# EAGLE board LED_WITH_8051 (EAGLE 9.6.2)
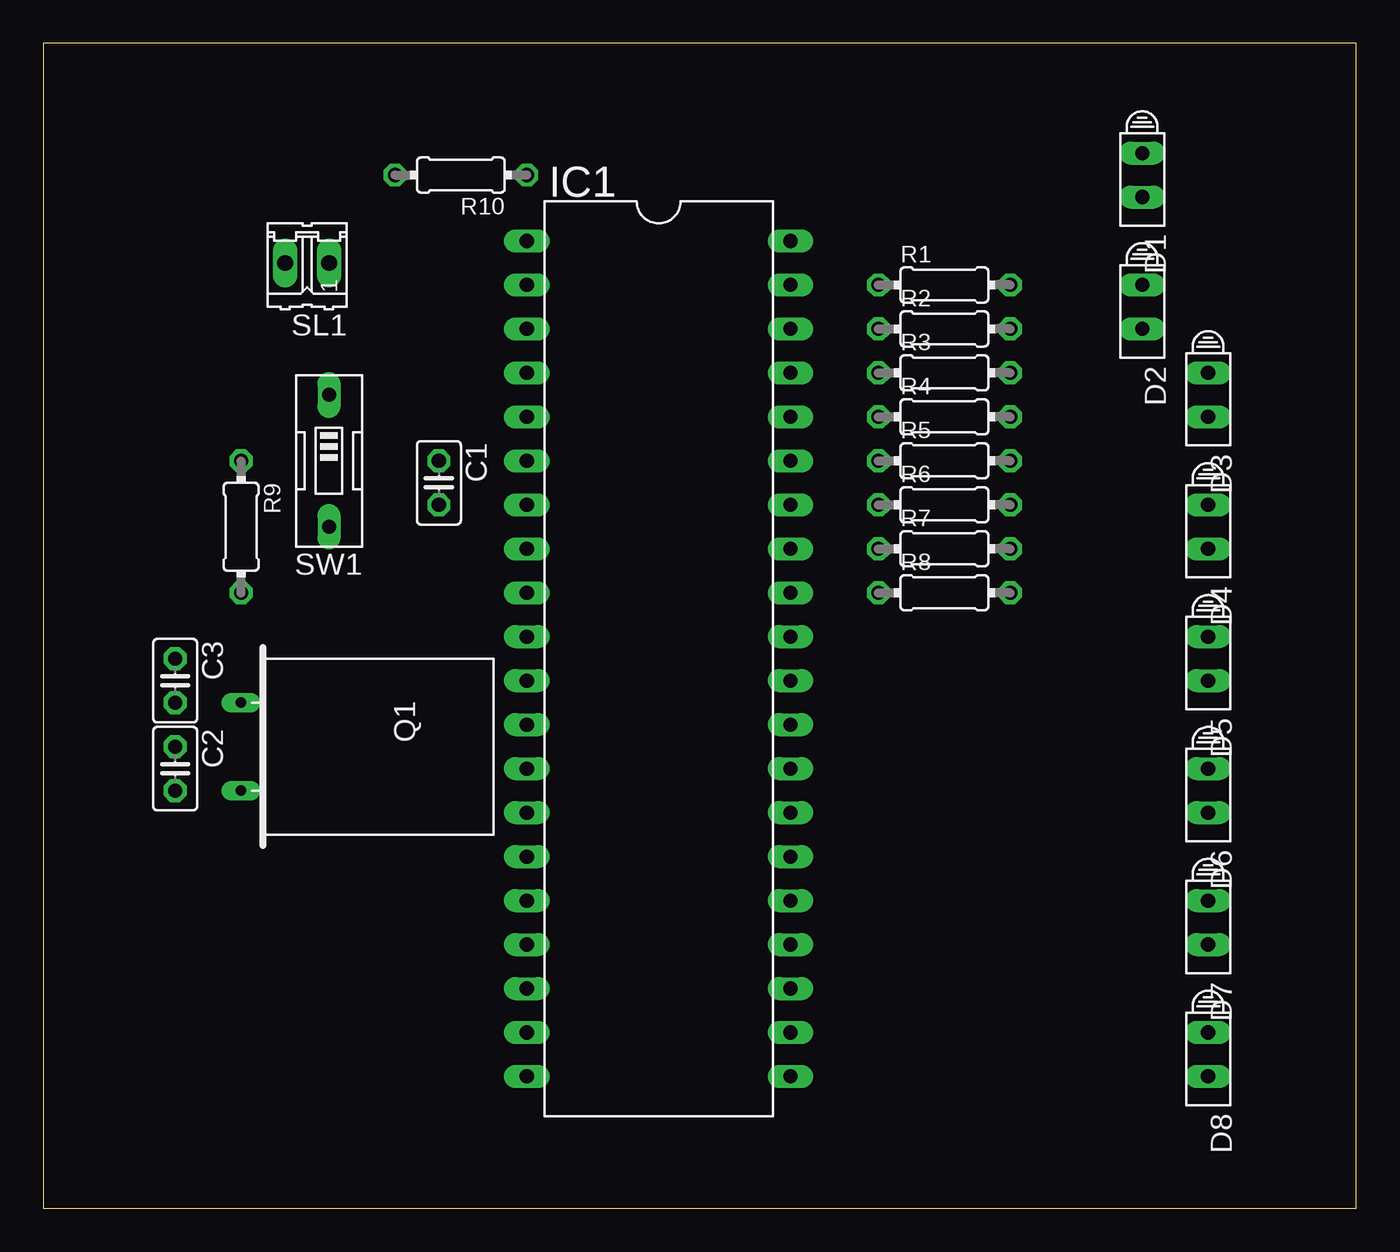
[diagram p0: board, top side]
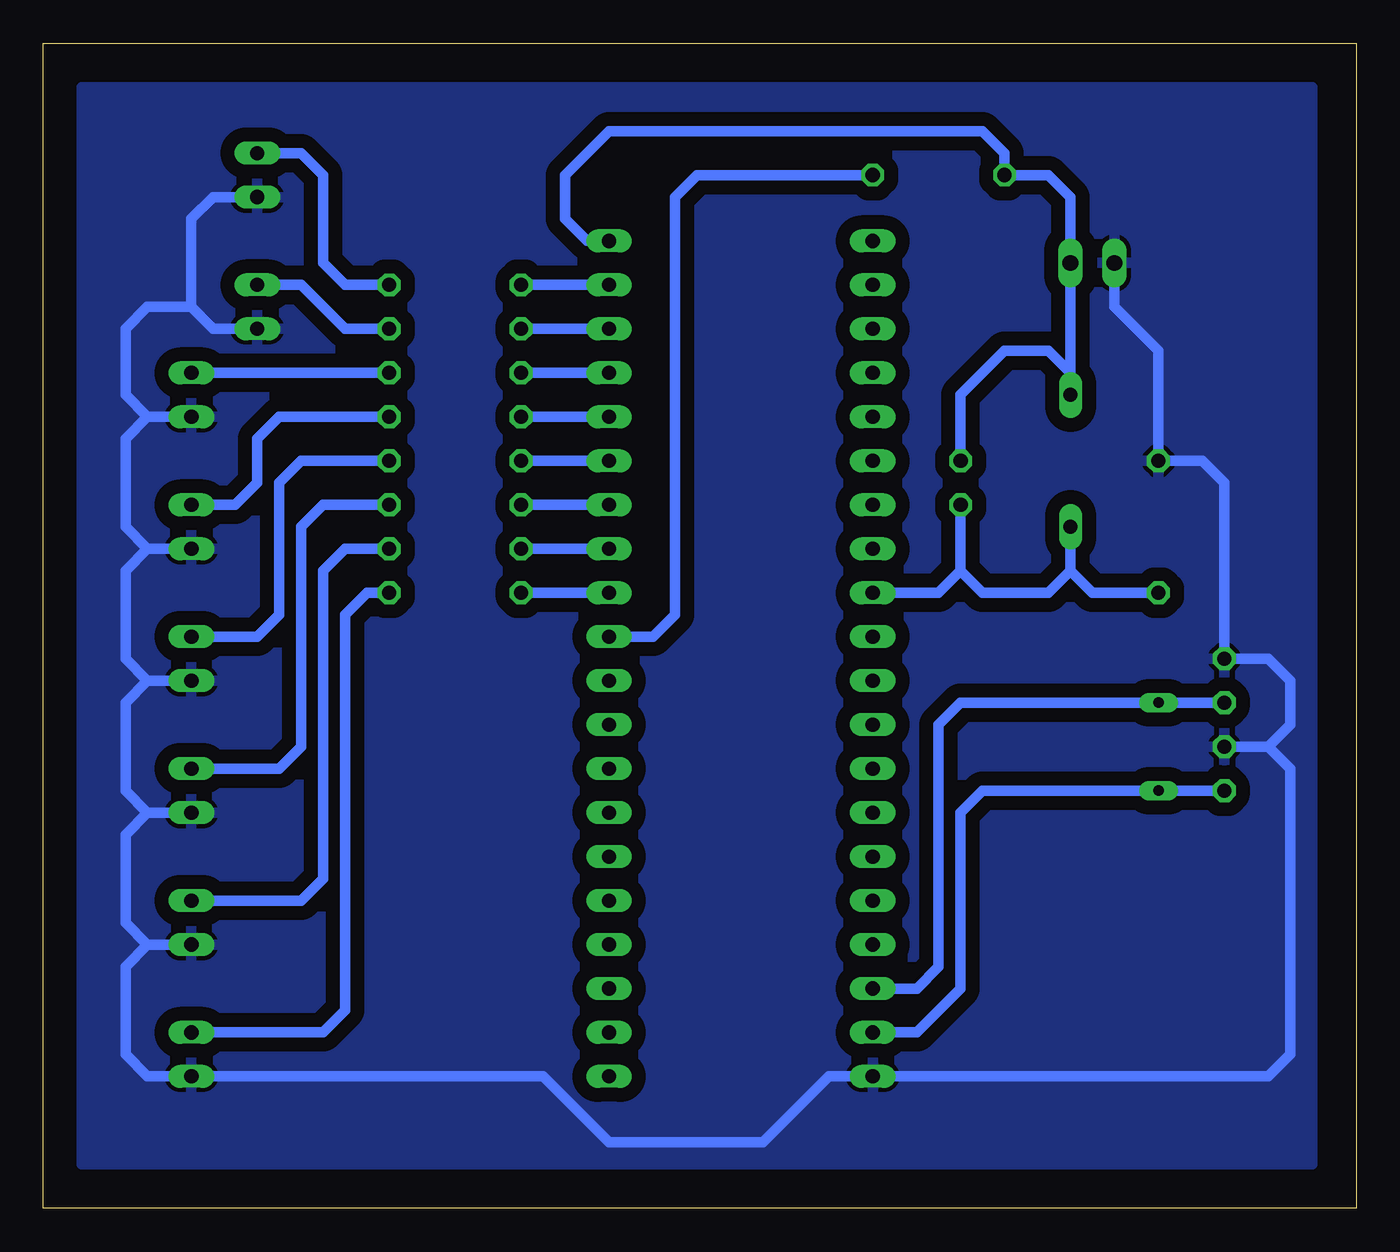
[diagram p1: board, bottom side, seen from below]

Size 75.87 x 67.3 mm. Coordinates in mm from the lower left corner, seen from the top.
Outline: 0,0 75.87,0 75.87,67.3 0,67.3 0,0
Copper layers (1*16): Top 0.035mm / dielectric 1.5mm / Bottom 0.035mm
Design rules "default": minimum track width 6mil, minimum drill 0.35mm, track to track 6mil, track to pad 6mil, pad to pad 6mil, via to via 6mil, smd to smd 6mil, copper to edge 40mil, drill to drill 6mil, minimum pad ring 10mil, minimum via ring 8mil, stop-mask expansion 4mil, vias tented up to drill 0mil, thermal gap 10mil

## Footprints (pad centres in the part's own frame; a part is rotated, then mirrored left to right if it is on the bottom)
C025-025X050 = drill 0.813 octagon: 1 -1.27,0; 2 1.27,0
HLMP6 = drill 0.813 long: A -1.27,0; K 1.27,0
DIL40 = drill 0.813 long: 1 -24.13,-7.62; 2 -21.59,-7.62; 3 -19.05,-7.62; 4 -16.51,-7.62; 5 -13.97,-7.62; 6 -11.43,-7.62; 7 -8.89,-7.62; 8 -6.35,-7.62; 9 -3.81,-7.62; 10 -1.27,-7.62; 11 1.27,-7.62; 12 3.81,-7.62; 13 6.35,-7.62; 14 8.89,-7.62; 15 11.43,-7.62; 16 13.97,-7.62; 17 16.51,-7.62; 18 19.05,-7.62; 19 21.59,-7.62; 20 24.13,-7.62; 21 24.13,7.62; 22 21.59,7.62; 23 19.05,7.62; 24 16.51,7.62; 25 13.97,7.62; 26 11.43,7.62; 27 8.89,7.62; 28 6.35,7.62; 29 3.81,7.62; 30 1.27,7.62; 31 -1.27,7.62; 32 -3.81,7.62; 33 -6.35,7.62; 34 -8.89,7.62; 35 -11.43,7.62; 36 -13.97,7.62; 37 -16.51,7.62; 38 -19.05,7.62; 39 -21.59,7.62; 40 -24.13,7.62
Q = drill 0.61 long: 1 -2.54,-7.62; 2 2.54,-7.62
0204/7 = drill 0.813 octagon: 1 -3.81,0; 2 3.81,0
02P = drill 0.914 long: 1 -1.27,0; 2 1.27,0
EDG-01 = drill 0.813 long: 1 0,-3.81; 2 0,3.81

## Placement (x,y rotation side)
C1  10uF/16V  [C025-025X050]  22.86,41.91 270 top
C2  33pF  [C025-025X050]  7.62,25.4 270 top
C3  33pF  [C025-025X050]  7.62,30.48 270 top
D1  HLMP6  [HLMP6]  63.5,59.69 270 top
D2  HLMP6  [HLMP6]  63.5,52.07 270 top
D3  HLMP6  [HLMP6]  67.31,46.99 270 top
D4  HLMP6  [HLMP6]  67.31,39.37 270 top
D5  HLMP6  [HLMP6]  67.31,31.75 270 top
D6  HLMP6  [HLMP6]  67.31,24.13 270 top
D7  HLMP6  [HLMP6]  67.31,16.51 270 top
D8  HLMP6  [HLMP6]  67.31,8.89 270 top
IC1  AT89C51-12PC  [DIL40]  35.56,31.75 270 top
Q1  11.0592MHz  [Q]  19.05,26.67 270 top
R1  1K  [0204/7]  52.07,53.34 0 top
R2  1K  [0204/7]  52.07,50.8 0 top
R3  1K  [0204/7]  52.07,48.26 0 top
R4  1K  [0204/7]  52.07,45.72 0 top
R5  1K  [0204/7]  52.07,43.18 0 top
R6  1K  [0204/7]  52.07,40.64 0 top
R7  1K  [0204/7]  52.07,38.1 0 top
R8  1K  [0204/7]  52.07,35.56 0 top
R9  10K  [0204/7]  11.43,39.37 270 top
R10  10K  [0204/7]  24.13,59.69 180 top
SL1  5V  [02P]  15.24,54.61 180 top
SW1  [EDG-01]  16.51,43.18 180 top

## Library data of the parts
C1-C3 = rcl; SPICEPREFIX: C
D1-D8 = display-hp; MF: AGILENT TECHNOLOGIES; MPN: HLMP-6500; OC_FARNELL: 1652490; OC_NEWARK: 40K0088
IC1 = atmel; OC_FARNELL: unknown; OC_NEWARK: unknown
Q1 SW1 = special
R1-R10 = rcl; SPICEPREFIX: R
SL1 = con-amp-quick; OC_FARNELL: unknown; OC_NEWARK: unknown

## Nets
GND: C2.1 C3.1 D1.K D2.K D3.K D4.K D5.K D6.K D7.K D8.K IC1.20 R9.1 SL1.2
N$1: C2.2 IC1.19 Q1.2
N$2: C3.2 IC1.18 Q1.1
N$3: IC1.36 R4.1
N$4: C1.2 IC1.9 R9.2 SW1.2
N$5: D1.A R1.2
N$6: D2.A R2.2
N$7: D3.A R3.2
N$8: D4.A R4.2
N$9: D5.A R5.2
N$10: D6.A R6.2
N$11: D7.A R7.2
N$12: D8.A R8.2
N$13: IC1.39 R1.1
N$14: IC1.38 R2.1
N$15: IC1.32 R8.1
N$16: IC1.33 R7.1
N$17: IC1.37 R3.1
N$18: IC1.35 R5.1
N$19: IC1.34 R6.1
N$22: IC1.31 R10.1
VCC: C1.1 IC1.40 R10.2 SL1.1 SW1.1

## Tracks (layer width: path | path; a pad name or v marks a point on that pad's centre or on a via)
GND
  Bottom 0.61: D1.K 66.04,58.42 67.31,57.15 67.31,52.07 | D2.K 66.04,50.8 67.31,52.07 | D3.K 69.85,45.72 | 69.85,45.72 71.12,46.99 71.12,50.8 69.85,52.07 67.31,52.07 | 69.85,38.1 71.12,39.37 71.12,44.45 69.85,45.72 | D4.K 69.85,38.1 | 69.85,30.48 71.12,31.75 71.12,36.83 69.85,38.1 | D6.K 69.85,22.86 | 69.85,22.86 71.12,24.13 71.12,29.21 69.85,30.48 | 69.85,30.48 D5.K | D7.K 69.85,15.24 | 69.85,15.24 71.12,16.51 71.12,21.59 69.85,22.86 | 69.85,15.24 71.12,13.97 71.12,8.89 69.85,7.62 D8.K 46.99,7.62 43.18,3.81 34.29,3.81 30.48,7.62 IC1.20 5.08,7.62 3.81,8.89 3.81,25.4 5.08,26.67 | SL1.2 13.97,52.07 11.43,49.53 R9.1 8.89,43.18 7.62,41.91 C3.1 5.08,31.75 3.81,30.48 3.81,27.94 5.08,26.67 | C2.1 5.08,26.67
  pour Bottom (isolate 0.813): 2.54,2.54 73.66,2.54 73.66,64.77 2.54,64.77
N$1
  Bottom 0.61: IC1.19 25.4,10.16 22.86,12.7 22.86,22.86 21.59,24.13 12.7,24.13 Q1.2 C2.2
N$2
  Bottom 0.61: C3.2 Q1.1 22.86,29.21 24.13,27.94 24.13,13.97 25.4,12.7 IC1.18
N$3
  Bottom 0.61: IC1.36 R4.1
N$4
  Bottom 0.61: SW1.2 16.51,36.83 | 16.51,36.83 15.24,35.56 12.7,35.56 R9.2 | IC1.9 24.13,35.56 22.86,36.83 | C1.2 22.86,36.83 | 22.86,36.83 21.59,35.56 17.78,35.56 16.51,36.83
N$5
  Bottom 0.61: R1.2 58.42,53.34 59.69,54.61 59.69,59.69 60.96,60.96 D1.A
N$6
  Bottom 0.61: D2.A 60.96,53.34 58.42,50.8 R2.2
N$7
  Bottom 0.61: R3.2 D3.A
N$8
  Bottom 0.61: D4.A 64.77,40.64 63.5,41.91 63.5,44.45 62.23,45.72 R4.2
N$9
  Bottom 0.61: R5.2 60.96,43.18 62.23,41.91 62.23,34.29 63.5,33.02 D5.A
N$10
  Bottom 0.61: R6.2 59.69,40.64 60.96,39.37 60.96,26.67 62.23,25.4 D6.A
N$11
  Bottom 0.61: R7.2 58.42,38.1 59.69,36.83 59.69,19.05 60.96,17.78 D7.A
N$12
  Bottom 0.61: R8.2 57.15,35.56 58.42,34.29 58.42,11.43 59.69,10.16 D8.A
N$13
  Bottom 0.61: IC1.39 R1.1
N$14
  Bottom 0.61: IC1.38 R2.1
N$15
  Bottom 0.61: IC1.32 R8.1
N$16
  Bottom 0.61: IC1.33 R7.1
N$17
  Bottom 0.61: IC1.37 R3.1
N$18
  Bottom 0.61: IC1.35 R5.1
N$19
  Bottom 0.61: IC1.34 R6.1
N$22
  Bottom 0.61: IC1.31 40.64,33.02 39.37,34.29 39.37,58.42 38.1,59.69 R10.1
VCC
  Bottom 0.61: C1.1 22.86,46.99 20.32,49.53 17.78,49.53 16.51,48.26 SW1.1 SL1.1 16.51,58.42 17.78,59.69 R10.2 20.32,60.96 21.59,62.23 43.18,62.23 45.72,59.69 45.72,57.15 44.45,55.88 IC1.40